# EAGLE board dsbluetooth (EAGLE 5.06)
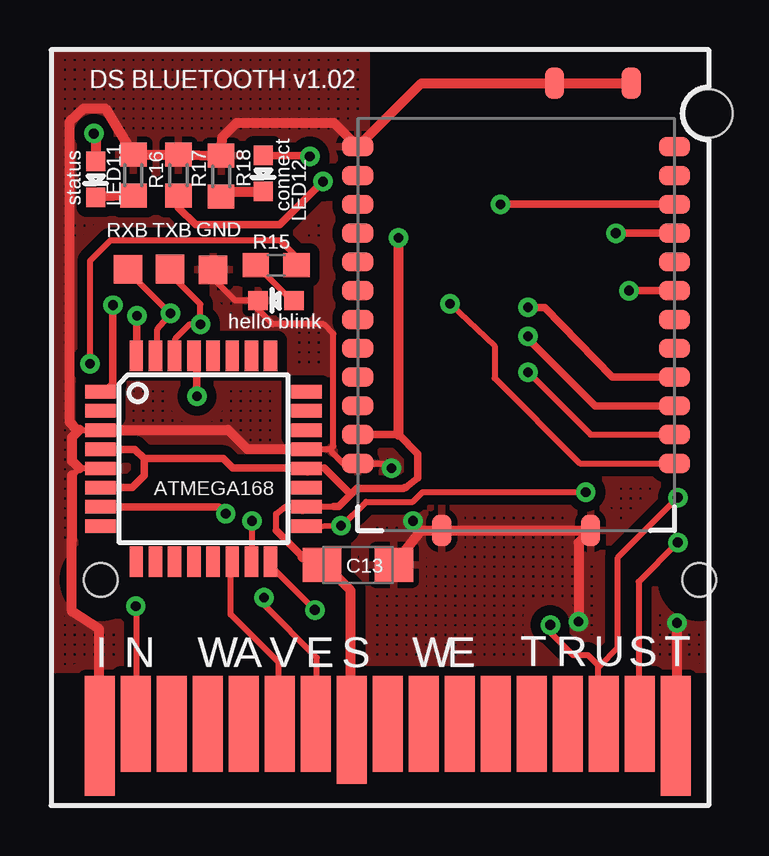
[diagram p0: board, top side]
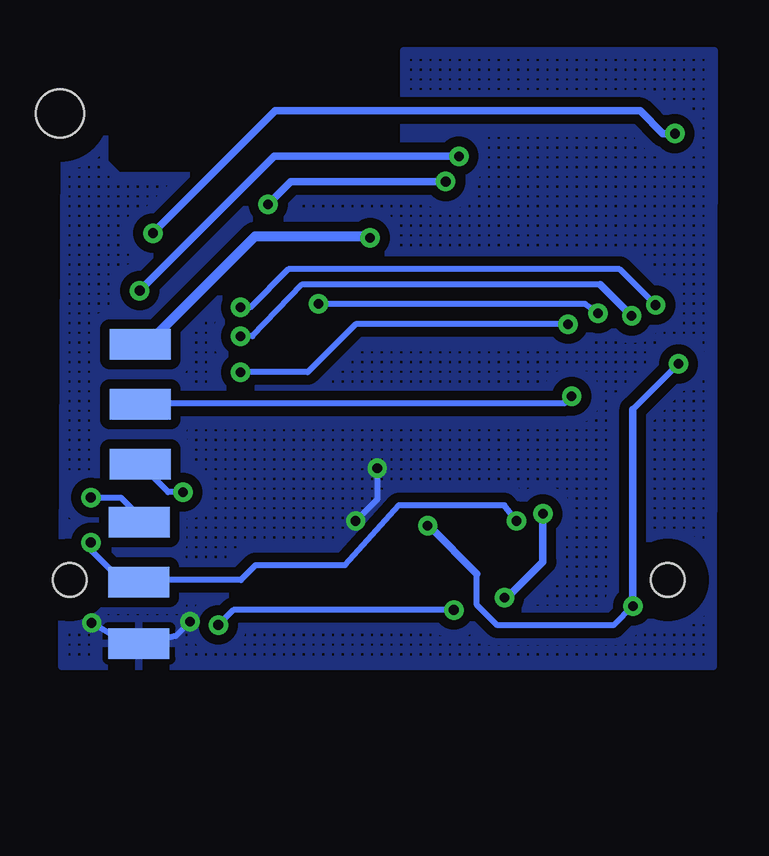
[diagram p1: board, bottom side, seen from below]

No outline drawn. Coordinates in mm, seen from the top.
Copper layers (1*16): Top 0.035mm / dielectric 1.5mm / Bottom 0.035mm
Design rules "default": minimum track width 10mil, minimum drill 24mil, track to track 8mil, track to pad 8mil, pad to pad 8mil, via to via 8mil, smd to smd 8mil, copper to edge 40mil, drill to drill 8mil, minimum pad ring 10mil, minimum via ring 8mil, stop-mask expansion 4mil, vias tented up to drill 0mil, thermal gap 10mil

## Footprints (pad centres in the part's own frame; a part is rotated, then mirrored left to right if it is on the bottom)
SMC_A = smd 1.6 x 1.4: + -1.5,0; - 1.5,0
SMD1,27-2,54 = smd 1.27 x 2.54: 1 0,0
LED-0603 = smd 0.8 x 0.8: A 0,-0.75; C 0,0.75
0603 = smd 1.1 x 1: 1 -0.85,0; 2 0.85,0
R0603 = smd 1 x 1.1: 1 -0.85,0; 2 0.85,0
TP12SQ = smd 1.2 x 1.2: TP 0,0
TQFP32-08 = smd 1.27 x 0.559: 1 -4.293,2.8; 2 -4.293,2; 3 -4.293,1.2; 4 -4.293,0.4; 5 -4.293,-0.4; 6 -4.293,-1.2; 7 -4.293,-2; 8 -4.293,-2.8; 17 4.293,-2.8; 18 4.293,-2; 19 4.293,-1.2; 20 4.293,-0.4; 21 4.293,0.4; 22 4.293,1.2; 23 4.293,2; 24 4.293,2.8 | smd 0.559 x 1.27: 9 -2.8,-4.293; 10 -2,-4.293; 11 -1.2,-4.293; 12 -0.4,-4.293; 13 0.4,-4.293; 14 1.2,-4.293; 15 2,-4.293; 16 2.8,-4.293; 25 2.8,4.293; 26 2,4.293; 27 1.2,4.293; 28 0.4,4.293; 29 -0.4,4.293; 30 -1.2,4.293; 31 -2,4.293; 32 -2.8,4.293
BLUERADIO_BR-C40A = smd 0.8 x 1.3: 1 -6.6,-6.6; 2 -5.4,-6.6; 3 -4.2,-6.6; 4 -3,-6.6; 5 -1.8,-6.6; 6 -0.6,-6.6; 7 0.6,-6.6; 8 1.8,-6.6; 9 3,-6.6; 10 4.2,-6.6; 11 5.4,-6.6; 12 6.6,-6.6; 13 6.6,6.6; 14 5.4,6.6; 15 4.2,6.6; 16 3,6.6; 17 1.8,6.6; 18 0.6,6.6; 19 -0.6,6.6; 20 -1.8,6.6; 21 -3,6.6; 22 -4.2,6.6; 23 -5.4,6.6; 24 -6.6,6.6 | smd 1.3 x 0.8: 25 -9.25,4.8; 27 -9.25,1.6; 28 9.4,3.1; 29 9.4,-3.1
M3_CARTRIDGE = smd 1.25 x 5: 1 1.975,3; 17 25.975,3 | smd 1.25 x 4: 2 3.475,3.5; 3 4.975,3.5; 4 6.475,3.5; 5 7.975,3.5; 6 9.475,3.5; 7 10.975,3.5; 9 13.975,3.5; 10 15.475,3.5; 11 16.975,3.5; 12 18.475,3.5; 13 19.975,3.5; 14 21.475,3.5; 15 22.975,3.5; 16 24.475,3.5 | smd 1.25 x 4.5: 8 12.475,3.25 | hole 1.4: 2.025,9.5; 26.95,9.5 | hole 2: 27.35,28.95

## Placement (x,y rotation side)
C13  [SMC_A]  12.81,10.03 0 top
GND  [SMD1,27-2,54]  24.13,6.76 90 bottom
LED10  [LED-0603]  9.4,21.06 90 top
LED11  [LED-0603]  1.88,26.11 180 top
LED12  [LED-0603]  8.86,26.36 180 top
MISO  [SMD1,27-2,54]  24.12,11.82 90 bottom
MOSI  [SMD1,27-2,54]  24.14,9.31 90 bottom
R15  [0603]  9.4,22.54 180 top
R16  [R0603]  3.45,26.29 90 top
R17  [R0603]  5.33,26.29 90 top
R18  [R0603]  7.11,26.24 90 top
RST  [SMD1,27-2,54]  24.08,16.73 90 bottom
SCK  [SMD1,27-2,54]  24.08,14.24 90 bottom
TP1  TPTP12SQ  [TP12SQ]  4.98,22.36 0 top
TP2  TPTP12SQ  [TP12SQ]  3.23,22.36 0 top
TP3  TPTP12SQ  [TP12SQ]  6.77,22.34 0 top
U$12  ATMEGA168  [TQFP32-08]  6.37,14.46 0 top
U$13  BLUERADIO_BR-C40ABAS  [BLUERADIO_BR-C40A]  19.4,20.87 270 top
U$14  M3_CARTRIDGE  [M3_CARTRIDGE]  0.07,-0.09 0 top
VCC  [SMD1,27-2,54]  24.08,19.23 270 bottom

## Library data of the parts
C13 R16-R18 = rcl
GND MISO MOSI RST SCK VCC = wirepad
LED10-LED12 R15 U$12 U$13 = SparkFunEagle-6-6-07
TP1-TP3 = testpad
U$14 = nds_cart1

## Nets
CS1: U$12.14 U$14.6
CTS3: U$12.1 U$13.16
GND3: C13.- GND.1 LED10.C R16.2 R17.2 R18.2 TP3.TP U$12.3 U$12.5 U$12.21 U$13.1 U$13.12 U$13.25 U$13.27 U$13.28 U$13.29 U$14.1 U$14.17
IRQ1: U$12.7 U$14.7
MISO3: MISO.1 U$12.16 U$14.15
MOSI3: MOSI.1 U$12.15 U$14.16
N$32: LED10.A R15.2
N$33: RST.1 U$12.29
N$34: LED11.C R16.1
N$35: LED12.C R18.1
N$38: LED12.A U$13.19
N$40: LED11.A U$13.21
N$42: R17.1 U$13.22
RTS3: U$12.32 U$13.15
RX3: TP2.TP U$12.31 U$13.13
SCK3: R15.1 SCK.1 U$12.17 U$14.2
TX3: TP1.TP U$12.30 U$13.14
VCC3: C13.+ U$12.4 U$12.6 U$12.18 U$12.20 U$13.11 U$14.8 VCC.1

## Tracks (layer width: path | path; a pad name or v marks a point on that pad's centre or on a via)
CS1
  Top 0.254: 9.5,3.45 9.5,5.96 7.5,7.96 7.5,10.09 U$12.14
  Top 0.305: U$14.6 9.5,3.45
CTS3  (via drill 0.4)
  Top 0.305: U$12.1 2.29,17.25 2.6,17.57 v2.6,20.86 | U$13.16 23.4,17.86 20.6,20.77 v19.9,20.77
  Bottom 0.254: 20,20.77 v19.9,20.77 19.5,20.77 17.9,22.36 4.1,22.36 v2.6,20.86
GND3  (via drill 0.4)
  Top 0.254: 1.1,15.66 1.2,15.66 2,15.66 U$12.3 | U$13.1 13,27.46 | 2.09,14.06 2.1,14.06 | 2.09,14.06 U$12.5 | 2.09,14.06 1.2,14.06 0.9,13.77 | 10.63,14.87 10.67,14.83 | U$12.21 11.7,14.87 | U$13.12 12.7,14.27 | 26,2.77 26,2.86 U$14.17 26.1,2.96 | U$13.12 12.2,14.27 11.7,14.77 11.7,14.87 | U$14.1 2,2.95 | 15.43,11.46 15.1,11.79 v15.1,11.87 | v14.2,14.06 14,14.27 U$13.12 | 11.7,14.87 11.7,14.9 11.79,14.99 11.79,19.66 11.38,20.07 9.27,20.07 8.65,20.69 LED10.C 8.59,21.05 8.59,21.06 7.7,21.06 6.77,21.98 TP3.TP
  Top 0.305: U$13.27 21,29.96 | 10.5,14.87 10.51,14.86 U$12.21 | U$13.29 16.4,11.37 16.5,11.46
  Top 0.406: U$12.21 10.67,14.83 10.6,14.77 10.5,14.87 | U$13.25 21.15,30.11 21,29.96 | U$13.27 15.45,30.11 U$13.1 11.8,28.46 7.75,28.46 7.16,27.88 R18.2 R17.2 R16.2 2.27,29.07 1.4,29.07 0.8,28.52 0.8,15.96 1.1,15.66 | 16.5,11.46 U$13.28 22,10.96 v22,7.67 | 1.2,15.66 0.9,15.37 0.9,14.37 1.2,14.06 | 10.63,14.87 8.2,14.87 7.4,15.66 2,15.66 | v26.1,7.62 26.1,2.96 | 2,2.95 2.03,7.37 0.9,8.09 0.89,8.14 0.89,11.12 0.9,11.06 0.9,13.77 | C13.- 15.43,11.46 U$13.29
  Bottom 0.254: v26.1,7.62 24.5,6.67 24.1,6.67 | 24.1,6.67 24.1,6.72 GND.1 | v22,7.67 22.6,7.07 24.1,6.67 | v15.1,11.87 14.2,12.77 v14.2,14.06
  pour Top (isolate 0.406, hatched): 0.2,5.68 27.35,5.68 27.3,27.66 arc-90 26.25,28.71 26.25,28.91 arc-90 27.25,30.01 27.25,31.47 26.3,31.47 25.6,30.77 25.6,26.82 25.05,26.27 13.5,26.27 13.15,26.62 13.15,31.47 0.2,31.47
  pour Bottom (isolate 0.406, hatched): 0.2,5.81 27.35,5.81 27.25,27.66 arc-90 26.2,28.71 26.2,28.91 arc-90 27.2,30.01 27.2,31.47 26.25,31.47 25.55,30.77 25.55,26.82 25,26.27 13.45,26.27 13.1,26.62 13.1,31.47 0.15,31.47
IRQ1  (via drill 0.4)
  Top 0.254: 11.05,4.51 11,4.46 11,3.37 | 11.1,4.57 11.1,6.17 8.9,8.37 v8.9,8.66
  Top 0.305: U$12.7 7.01,12.46 v7.3,12.16 | 11.05,4.51 11.1,4.57 | 11,3.37 11.01,3.37 U$14.7
  Bottom 0.305: v8.9,8.66 8.8,8.66 7.3,10.16 v7.3,12.16
MISO3  (via drill 0.41)
  Top 0.254: 23.1,3.46 22.8,3.76 22.8,5.75 22.86,5.81 | 22.86,5.81 23.64,6.59 23.64,10.34 v26.14,12.84 | U$12.16 9.05,10.12 v11.01,8.15 | v20.83,7.53 20.83,7.21 21.77,6.28 22.39,6.28 22.86,5.81 | 22.86,5.81
  Top 0.305: 23.1,3.46 U$14.15
  Bottom 0.254: MISO.1 24.04,11.81 23.95,11.9 24.89,12.84 v26.14,12.84 | v11.01,8.15 20.2,8.15 v20.83,7.53
MOSI3  (via drill 0.4, 0.41)
  Top 0.254: U$12.15 8.4,10.16 v8.4,11.87 | 24.5,3.27 24.5,3.36 U$14.16 | 24.5,3.45 24.5,9.33 v26.14,10.96
  Top 0.305: 24.5,3.45 U$14.16
  Bottom 0.254: v8.4,11.87 8.9,12.52 13.3,12.52 15.55,10.02 19.28,10.02 19.89,9.4 23.95,9.4 24.05,9.3 MOSI.1 24.17,9.3 24.27,9.4 24.89,9.4 26.14,10.65 v26.14,10.96
N$32
  Top 0.254: R15.2 8.58,22.54 10.06,21.05 LED10.A
N$33  (via drill 0.4)
  Top 0.305: U$12.29 5.97,18.7 6.1,18.57 v6.1,17.07
  Bottom 0.254: RST.1 24.1,16.75 24.1,16.77 6.4,16.77 v6.1,17.07
N$34
  Top 0.406: R16.1 1.88,25.39 LED11.C
N$35
  Top 0.406: LED12.C 7.38,25.61 R18.1
N$38  (via drill 0.41)
  Top 0.305: LED12.A 10.76,27.11 v10.8,27.07 | v24.1,21.46 U$13.19
  Bottom 0.305: v10.8,27.07 18.5,27.07 v24.1,21.46
N$40  (via drill 0.41)
  Top 0.305: v23.55,23.86 U$13.21
  Top 0.406: LED11.A 1.88,27.93 v1.8,28.02
  Bottom 0.305: v1.8,28.02 2.3,28.02 3.25,28.96 18.45,28.96 v23.55,23.86
N$42  (via drill 0.41)
  Top 0.305: R17.1 5.33,24.93 6.05,24.21 9.55,24.21 v11.35,26.02 | v18.75,25.07 U$13.22
  Bottom 0.305: v11.35,26.02 17.8,26.02 v18.75,25.07
RTS3  (via drill 0.4)
  Top 0.305: v19.9,19.57 20.1,19.66 20.1,19.27 22.7,16.66 U$13.15 | U$12.32 3.69,18.75 3.7,18.77 3.6,18.86 v3.6,20.41
  Bottom 0.254: 4.9,21.71 17.35,21.71 19.4,19.57 v19.9,19.57
  Bottom 0.305: v3.6,20.41 4.9,21.71
RX3  (via drill 0.4)
  Top 0.254: U$13.13 22.05,14.27 18.5,17.82 18.5,19.16 v16.65,20.91 | v5,20.52 4.45,19.86 4.45,18.71 4.42,18.75 U$12.31 | v5,20.52 | 5,20.5 | v5,20.52 5,20.5 | TP2.TP 3.23,22.27 5,20.5
  Bottom 0.254: v16.65,20.91 5.55,20.91 v5,20.52
SCK3  (via drill 0.4)
  Top 0.254: R15.1 10.25,22.86 9.55,23.57 2.5,23.57 1.65,22.71 v1.65,18.41 | v3.55,8.31 3.6,8.27 3.6,3.46 | U$12.17 10.65,11.64 10.65,11.62 v12.1,11.66 12.1,11.62 13.15,12.66 15.1,12.66 15.5,13.06 v22.3,13.06
  Top 0.305: U$14.2 3.6,3.46
  Bottom 0.254: 3.55,16.52 v1.65,18.41 | v3.55,8.31 4.35,7.51 9.2,7.51 10.05,8.37 10.05,9.66 | 12,11.62 v12.1,11.66 | SCK.1 22.91,13.06 v22.3,13.06
  Bottom 0.305: v3.55,8.31 3.55,16.52 | 10.05,9.66 12,11.62
TX3  (via drill 0.4)
  Top 0.254: U$13.14 22.5,15.46 v19.9,18.07 | 5.25,18.71 5.2,18.66 5.17,18.7 U$12.30 5.22,18.75 5.25,18.71 | 5.25,18.71 5.2,18.77 5.2,19.46 5.8,20.07 v6.25,20.07 | 6.27,20.04 v6.25,20.06 v6.25,20.07 | TP1.TP 4.98,22.18 6.25,20.9 6.25,20.17 6.3,20.12 v6.25,20.07
  Bottom 0.254: v19.9,18.07 17.1,18.07 15.1,20.07 v6.25,20.07
VCC3  (via drill 0.41)
  Top 0.254: U$14.8 12.5,3.2 | 9.4,11.46 9.4,12.16 9.8,12.46 10.6,12.46 | U$12.20 11.4,14.06 | 10.6,12.46 10.66,12.46 U$12.18 | 10.6,12.46 11.8,12.46
  Top 0.305: U$12.4 3.51,14.86 3.9,14.46 | 3.9,14.46 3.9,13.77 3.4,13.27 2.1,13.27 | 3.9,14.46 7.2,14.46 7.6,14.06 10.6,14.06 | U$13.11 14.5,15.46 15.3,14.66 15.3,13.66 14.8,13.27 14.75,13.27 14.7,13.21 12.75,13.21 12.5,12.96 | 10.5,10.37 9.4,11.46 | 11.8,12.46 12,12.46 12.5,12.96 | 12.5,12.96 11.4,14.06
  Top 0.406: 2.08,13.24 2,13.16 | 2.08,13.24 U$12.6 | 2.1,13.27 2.08,13.24 | 10.67,14 10.7,13.96 | U$12.20 10.67,14 | 10.67,14 10.6,14.06 | 10.5,12.37 10.59,12.46 U$12.18 | 12.5,3.2 12.5,8.96 11.3,10.16 11.3,10.34 C13.+ 11.3,10.36 11.3,10.37 10.5,10.37 | 14.5,15.46 14.5,15.47 v14.5,23.67
  Bottom 0.406: VCC.1 23.98,19.05 19.3,23.72 14.55,23.72 v14.5,23.67

## Text on the board
tPlace: DS BLUETOOTH v1.02
tNames: connect | status | RXB | TXB | GND | hello blink
_tsilk: DS BLUETOOTH v1.02 | LED11 | connect | status | LED12 | R16 | R17 | R18 | RXB | TXB | GND | R15 | TPTP12SQ | TPTP12SQ | TPTP12SQ | hello blink | ATMEGA168 | C13 | I | N | W | A | V | E | S | W | E | T | R | U | S | T